# EAGLE board Arduino Due 6-channel servo current sensor v30 (EAGLE 9.7.0)
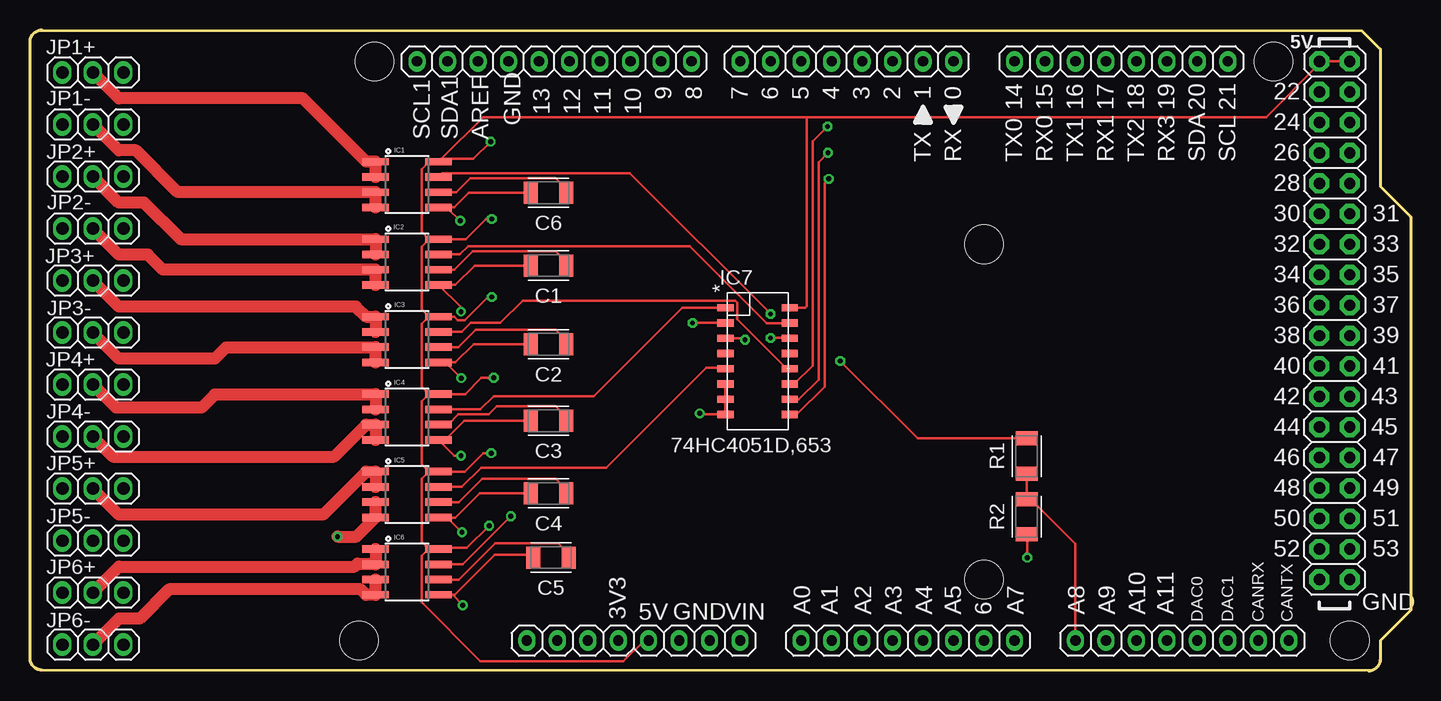
[diagram p0: board, top side]
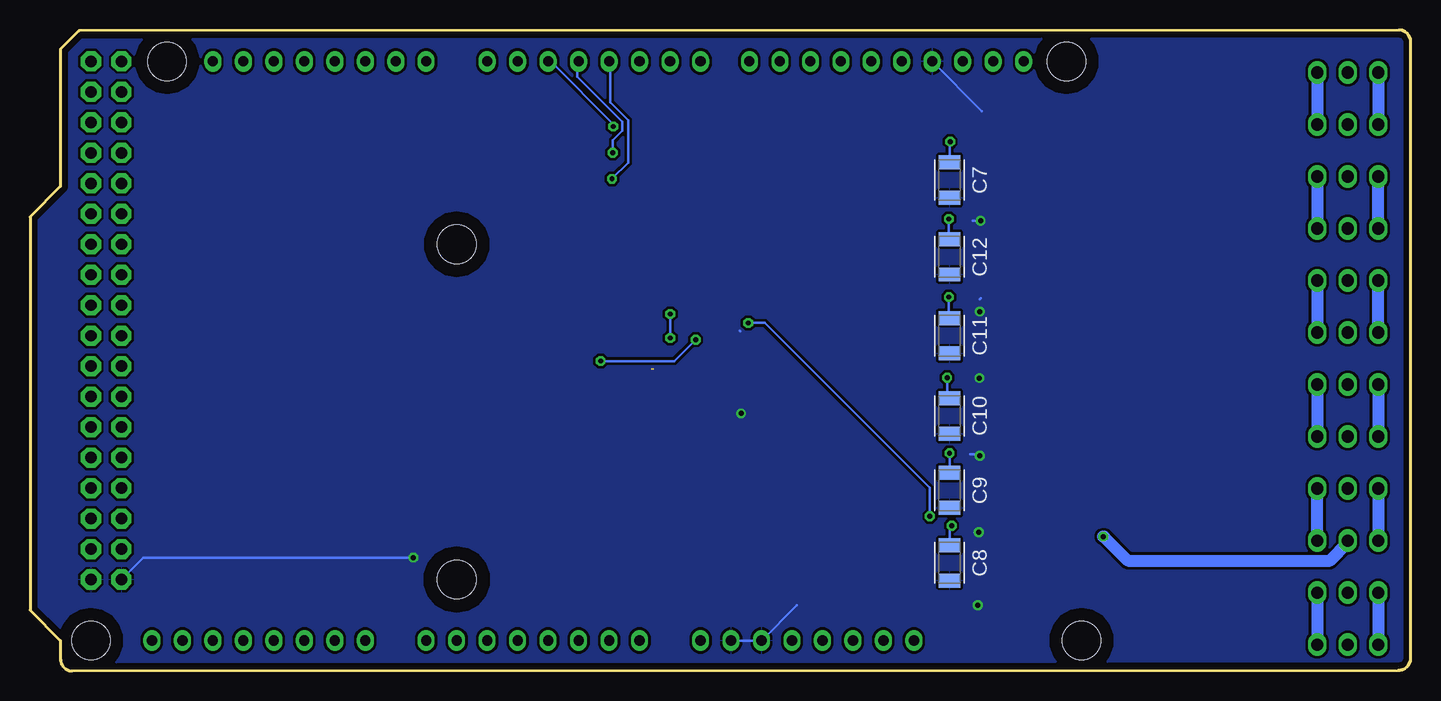
[diagram p1: board, bottom side, seen from below]

Size 115.06 x 53.42 mm. Coordinates in mm from the lower left corner, seen from the top.
Outline: 111,53.34 112.52,51.82 112.52,40.39 115.06,37.85 115.06,5.08 112.52,2.54 112.52,1 arc-90 111.52,0 1,0.08 arc-90 0,1.08 0,52.42 arc-90 1,53.42 111,53.34
Copper layers (1*16): Top 0.035mm / dielectric 1.6mm / Bottom 0.035mm
Design rules "default *": minimum track width 8mil, minimum drill 16mil, track to track 8mil, track to pad 8mil, pad to pad 8mil, via to via 8mil, smd to smd 6mil, copper to edge 20mil, drill to drill 12mil, minimum pad ring 9mil, minimum via ring 8mil, stop-mask expansion 2mil, vias tented up to drill 25mil, thermal gap 8mil
Net classes: 0 default: width 0.203 mm, drill 0.406 mm, clearance 0.203 mm; 1 USB: width 0.203 mm, drill 0.406 mm, clearance 0.203 mm; 2 gnd: width 0.203 mm, drill 0.406 mm, clearance 0.203 mm; 3 usbvcc: width 0.203 mm, drill 0.406 mm, clearance 0.203 mm; 4 USBpair: width 0.254 mm, drill 0.406 mm, clearance 0.61 mm to class 0, clearance 0.61 mm to class 1, clearance 0.61 mm to class 2, clearance 0.61 mm to class 3
Holes 3.2 mm at 109.98,2.54 28.7,50.8 103.63,50.8 27.43,2.54 79.5,35.56 79.5,7.62
tRestrict: area 77,5.1 to 82,10.2; area 26.2,48.3 to 31.2,53.3; area 77,33 to 82,38.1; area 101.1,48.3 to 106.2,53.3; area 107.4,0 to 112.5,5.1; area 24.9,0 to 30,5.1
bRestrict: area 77,5.1 to 82,10.2; area 26.2,48.3 to 31.2,53.3; area 77,33 to 82,38.1; area 101.1,48.3 to 106.2,53.3; area 107.4,0 to 112.5,5.1; area 24.9,0 to 30,5.1

## Footprints (pad centres in the part's own frame; a part is rotated, then mirrored left to right if it is on the bottom)
1X08 = drill 0.85 pad 1.422 long: 1 -8.89,0; 2 -6.35,0; 3 -3.81,0; 4 -1.27,0; 5 1.27,0; 6 3.81,0; 7 6.35,0; 8 8.89,0
CAPC3216X135 = smd 1.165 x 1.815: 1 -1.475,0; 2 1.475,0
SO08 = smd 0.61 x 2.21: 1 -1.905,-2.616; 2 -0.635,-2.616; 3 0.635,-2.616; 4 1.905,-2.616; 5 1.905,2.616; 6 0.635,2.616; 7 -0.635,2.616; 8 -1.905,2.616
SO16 = smd 1.35 x 0.6: 1 -2.215,5.62; 2 -2.215,4.35; 3 -2.215,3.08; 4 -2.215,1.81; 5 -2.215,0.54; 6 -2.215,-0.73; 7 -2.215,-2; 8 -2.215,-3.27; 9 3.135,-3.27; 10 3.135,-2; 11 3.135,-0.73; 12 3.135,0.54; 13 3.135,1.81; 14 3.135,3.08; 15 3.135,4.35; 16 3.135,5.62
1X03 = drill 1.016 long: 1 -2.54,0; 2 0,0; 3 2.54,0
1X10 = drill 0.85 pad 1.422 long: 1 -11.43,0; 2 -8.89,0; 3 -6.35,0; 4 -3.81,0; 5 -1.27,0; 6 1.27,0; 7 3.81,0; 8 6.35,0; 9 8.89,0; 10 11.43,0
RESC3216X70 = smd 1.165 x 1.815: 1 -1.475,0; 2 1.475,0
2X18 = drill 0.95 pad 1.676 octagon: 1 -21.59,-1.27; 2 -21.59,1.27; 3 -19.05,-1.27; 4 -19.05,1.27; 5 -16.51,-1.27; 6 -16.51,1.27; 7 -13.97,-1.27; 8 -13.97,1.27; 9 -11.43,-1.27; 10 -11.43,1.27; 11 -8.89,-1.27; 12 -8.89,1.27; 13 -6.35,-1.27; 14 -6.35,1.27; 15 -3.81,-1.27; 16 -3.81,1.27; 17 -1.27,-1.27; 18 -1.27,1.27; 19 1.27,-1.27; 20 1.27,1.27; 21 3.81,-1.27; 22 3.81,1.27; 23 6.35,-1.27; 24 6.35,1.27; 25 8.89,-1.27; 26 8.89,1.27; 27 11.43,-1.27; 28 11.43,1.27; 29 13.97,-1.27; 30 13.97,1.27; 31 16.51,-1.27; 32 16.51,1.27; 33 19.05,-1.27; 34 19.05,1.27; 35 21.59,-1.27; 36 21.59,1.27

## Placement (x,y rotation side)
ADCH  FH254-108DF08500V  [1X08]  96.01,2.54 0 top
ADCL  FH254-108DF08500V  [1X08]  73.15,2.54 0 top
C1  470n  [CAPC3216X135]  43.21,33.78 180 top
C2  470n  [CAPC3216X135]  43.21,27.23 180 top
C3  470n  [CAPC3216X135]  43.21,20.85 180 top
C4  470n  [CAPC3216X135]  43.21,14.81 180 top
C5  470n  [CAPC3216X135]  43.41,9.45 180 top
C6  470n  [CAPC3216X135]  43.21,39.85 180 top
C7  100n  [CAPC3216X135]  38.44,40.92 270 bottom
C8  100n  [CAPC3216X135]  38.44,9.01 270 bottom
C9  100n  [CAPC3216X135]  38.44,15.06 270 bottom
C10  100n  [CAPC3216X135]  38.44,21.26 270 bottom
C11  100n  [CAPC3216X135]  38.44,27.94 270 bottom
C12  100n  [CAPC3216X135]  38.44,34.52 270 bottom
COMMUNICATION  FH254-108DF08500V  [1X08]  90.93,50.8 0 top
IC1  ACS712  [SO08]  31.42,40.54 270 top
IC2  ACS712  [SO08]  31.42,34.08 270 top
IC3  ACS712  [SO08]  31.42,27.62 270 top
IC4  ACS712  [SO08]  31.42,21.17 270 top
IC5  ACS712  [SO08]  31.42,14.71 270 top
IC6  ACS712  [SO08]  31.42,8.25 270 top
IC7  74HC4051D,653  [SO16]  60.17,24.65 0 top
JP1+  PINHD-1X3  [1X03]  5.25,49.88 0 top
JP1-  PINHD-1X3  [1X03]  5.25,45.54 0 top
JP2+  PINHD-1X3  [1X03]  5.25,41.21 0 top
JP2-  PINHD-1X3  [1X03]  5.25,36.87 0 top
JP3+  PINHD-1X3  [1X03]  5.25,32.54 0 top
JP3-  PINHD-1X3  [1X03]  5.25,28.2 0 top
JP4+  PINHD-1X3  [1X03]  5.25,23.87 0 top
JP4-  PINHD-1X3  [1X03]  5.25,19.54 0 top
JP5+  PINHD-1X3  [1X03]  5.25,15.2 0 top
JP5-  PINHD-1X3  [1X03]  5.25,10.87 0 top
JP6+  PINHD-1X3  [1X03]  5.25,6.53 0 top
JP6-  PINHD-1X3  [1X03]  5.25,2.2 0 top
POWER  FH254-108DF08500V  [1X08]  50.29,2.54 0 top
PWMH  FH254-110DF08500V  [1X10]  43.69,50.8 180 top
PWML  FH254-108DF08500V  [1X08]  68.07,50.8 180 top
R1  2K4  [RESC3216X70]  83.06,17.91 90 top
R2  4K7  [RESC3216X70]  83.06,12.85 90 top
XIO  18x2F-H8.5  [2X18]  108.71,29.21 270 top

## Library data of the parts
ADCH ADCL COMMUNICATION POWER PWML = Connettori; MONTHLY_USAGE: _____; PART_NUMBER: 20TW-536; PRICE: _____; SUPPLIER: _____; TYPE: Connettori
C1-C12 = Capacitor; CATEGORY: Capacitor
IC1-IC6 = ACS712; PROD_ID: IC-08964
IC7 = 74HC4051D_653; PARTNO: 1727-2807-1-ND
JP1+ JP1- JP2+ JP2- JP3+ JP3- JP4+ JP4- JP5+ JP5- JP6+ JP6- = Connector; CATEGORY: CONNECTOR; SUB-CATEGORY: PIN-HEADER
PWMH = Connettori; MONTHLY_USAGE: _____; PART_NUMBER: 20TW-537; PRICE: _____; SUPPLIER: _____; TYPE: Connettori
R1 R2 = Resistor; CATEGORY: Resistor; SUB-CATEGORY: Fixed
XIO = Connettori; MONTHLY_USAGE: _____; PART_NUMBER: 12TW323; PRICE: _____; SUPPLIER: _____; TYPE: Connettori

## Nets
1IP+: IC1.1 IC1.2 JP1+.2
1IP-: IC1.3 IC1.4 JP1-.2
2IP+: IC2.1 IC2.2 JP2+.2
2IP-: IC2.3 IC2.4 JP2-.2
3IP+: IC3.1 IC3.2 JP3+.2
3IP-: IC3.3 IC3.4 JP3-.2
4IP+: IC4.1 IC4.2 JP4+.2
4IP-: IC4.3 IC4.4 JP4-.2
5IP+: IC5.1 IC5.2 JP5+.2
5IP-: IC5.3 IC5.4 JP5-.2
6IP+: IC6.1 IC6.2 JP6+.2
6IP-: IC6.3 IC6.4 JP6-.2
+3V3: POWER.4
+5V: C7.1 C8.1 C9.1 C10.1 C11.1 C12.1 IC1.8 IC2.8 IC3.8 IC4.8 IC5.8 IC6.8 IC7.16 POWER.5 XIO.1 XIO.2
AD0: ADCL.1
AD1: ADCL.2
AD2: ADCL.3
AD3: ADCL.4
AD4: ADCL.5
AD5: ADCL.6
AD6: ADCL.7
AD7: ADCL.8
AD8: ADCH.1 R1.1 R2.2
AD9: ADCH.2
AD10: ADCH.3
AD11: ADCH.4
AREF: PWMH.8
CANRX0: ADCH.7
CANTX0: ADCH.8
DAC0: ADCH.5
DAC1: ADCH.6
FILTER1: C6.1 IC1.6
FILTER2: C1.1 IC2.6
FILTER3: C2.1 IC3.6
FILTER4: C3.1 IC4.6
FILTER5: C4.1 IC5.6
FILTER6: C5.1 IC6.6
GND: C1.2 C2.2 C3.2 C4.2 C5.2 C6.2 C7.2 C8.2 C9.2 C10.2 C11.2 C12.2 IC1.5 IC2.5 IC3.5 IC4.5 IC5.5 IC6.5 IC7.6 IC7.7 IC7.8 POWER.6 POWER.7 PWMH.7 R2.1 XIO.35 XIO.36
N$1: JP6+.1 JP6-.1
N$2: JP6+.3 JP6-.3
N$5: JP5+.1 JP5-.1
N$6: JP5+.3 JP5-.3
N$7: JP4+.1 JP4-.1
N$8: JP4+.3 JP4-.3
N$9: JP3+.1 JP3-.1
N$10: JP3+.3 JP3-.3
N$11: JP2+.1 JP2-.1
N$12: JP2+.3 JP2-.3
N$13: JP1+.1 JP1-.1
N$14: JP1+.3 JP1-.3
PIN22: XIO.3
PIN23: XIO.4
PIN24: XIO.5
PIN25: XIO.6
PIN26: XIO.7
PIN27: XIO.8
PIN28: XIO.9
PIN29: XIO.10
PIN30: XIO.11
PIN31: XIO.12
PIN32: XIO.13
PIN33: XIO.14
PIN34: XIO.15
PIN35: XIO.16
PIN36: XIO.17
PIN37: XIO.18
PIN38: XIO.19
PIN39: XIO.20
PIN40: XIO.21
PIN41: XIO.22
PIN42: XIO.23
PIN43: XIO.24
PIN44: XIO.25
PIN45: XIO.26
PIN46: XIO.27
PIN47: XIO.28
PIN48: XIO.29
PIN49: XIO.30
PIN50: XIO.31
PIN51: XIO.32
PIN52: XIO.33
PIN53: XIO.34
PWM2: IC7.11 PWML.3
PWM3: IC7.10 PWML.4
PWM4: IC7.9 PWML.5
PWM5: PWML.6
PWM6: PWML.7
PWM7: PWML.8
PWM8: PWMH.1
PWM9: PWMH.2
PWM10: PWMH.3
PWM11: PWMH.4
PWM12: PWMH.5
PWM13: PWMH.6
RESET: POWER.3
RXD0: PWML.1
RXD1: COMMUNICATION.6
RXD2: COMMUNICATION.4
RXD3: COMMUNICATION.2
SCL0: COMMUNICATION.8
SCL1: PWMH.10
SDA0: COMMUNICATION.7
SDA1: PWMH.9
TXD0: PWML.2
TXD1: COMMUNICATION.5
TXD2: COMMUNICATION.3
TXD3: COMMUNICATION.1
VIN: POWER.8
VIOUT1: IC1.7 IC7.14
VIOUT2: IC2.7 IC7.15
VIOUT3: IC3.7 IC7.12
VIOUT4: IC4.7 IC7.1
VIOUT5: IC5.7 IC7.5
VIOUT6: IC6.7 IC7.2
Z-COMMON: IC7.3 R1.2

## Tracks (layer width: path | path; a pad name or v marks a point on that pad's centre or on a via)
1IP+
  Top 1.016: JP1+.2 7.41,47.71 22.74,47.71 28.01,42.44 IC1.1 IC1.2
1IP-
  Top 1.016: JP1-.2 7.41,43.38 8.84,43.38 12.31,39.9 IC1.3 IC1.4
2IP+
  Top 1.016: JP2+.2 7.41,39.04 9.49,39.04 12.55,35.98 IC2.1 IC2.2
2IP-
  Top 1.016: JP2-.2 7.41,34.71 9.82,34.71 11.08,33.44 IC2.3 IC2.4
3IP+
  Top 1.016: JP3+.2 7.41,30.37 27.16,30.37 28.01,29.53 IC3.1 IC3.2
3IP-
  Top 1.016: IC3.4 IC3.3 28.77,26.95 16.32,26.95 15.41,26.04 7.41,26.04 JP3-.2
4IP+
  Top 1.016: IC4.2 IC4.1 28.77,23.03 15.39,23.03 14.3,21.95 7.17,21.95 JP4+.2
4IP-
  Top 1.016: JP4-.2 6.91,17.87 25.35,17.87 28.01,20.53 IC4.3 IC4.4
5IP+
  Top 1.016: JP5+.2 7.41,13.03 24.43,13.03 28.01,16.61 IC5.1 IC5.2
5IP-  (via drill 0.41)
  Top 1.016: IC5.3 IC5.4 27.21,11.2 v25.63,11.2
  Bottom 1.016: v25.63,11.2 25.58,11.2 23.58,9.2 6.72,9.2 5.25,10.68 JP5-.2
6IP+
  Top 1.016: JP6+.2 7.41,8.7 27.05,8.7 27.3,8.95 28.75,8.95 IC6.2 IC6.1
6IP-
  Top 1.016: JP6-.2 7.41,4.36 9.14,4.36 11.58,6.8 27.55,6.8 28.01,6.35 IC6.4 IC6.3
+5V  (via drill 0.41)
  Top 0.203: 33.24,16.61 32.63,16 32.63,10.77 33.24,10.16 IC6.8 | 33.24,23.07 32.63,22.46 32.63,17.22 33.24,16.61 | 33.24,16.61 IC5.8 36.23,16.61 37.77,18.16 v38.43,18.16 | 33.24,29.53 32.63,28.92 32.63,23.68 33.24,23.07 | 33.24,23.07 IC4.8 36.25,23.07 37.62,24.43 v38.64,24.43 | 33.24,35.98 32.63,35.37 32.63,30.14 33.24,29.53 | 33.24,29.53 IC3.8 35.34,29.53 35.63,29.24 36.21,29.24 38.14,31.16 v38.49,31.16 | 33.24,35.98 32.63,36.59 32.63,41.83 33.24,42.44 IC1.8 34.28,42.68 | 33.24,35.98 IC2.8 36.3,35.98 37.98,37.67 v38.49,37.67 | 64.71,46.15 103.01,46.15 107.44,50.59 XIO.1 XIO.2 | 64.71,46.15 37.75,46.15 34.28,42.68 | IC6.8 33.2,10.16 32.63,9.59 32.63,5.72 37.54,0.81 49.44,0.81 51.17,2.54 POWER.5 | v38.38,44.12 36.95,42.68 34.28,42.68 | IC6.8 34.14,10.26 36.4,10.26 v38.26,12.11 | 64.71,46.15 64.71,30.38 64.59,30.25 63.34,30.25 IC7.16
  Bottom 0.203: C7.1 38.43,44.07 v38.38,44.12 | v38.49,37.67 38.49,36.04 C12.1 | v38.49,31.16 38.49,29.46 C11.1 | v38.64,24.43 38.64,22.94 C10.1 | v38.43,18.16 C9.1 | v38.26,12.11 38.43,11.94 C8.1
AD8
  Top 0.203: R1.1 R2.2 83.38,14.33 87.12,10.59 ADCH.1
FILTER1
  Top 0.203: C6.1 44.69,40.18 43.8,41.06 36.7,41.06 35.54,39.9 IC1.6
FILTER2
  Top 0.203: C1.1 44.69,34.11 43.8,34.99 36.9,34.99 35.35,33.44 IC2.6
FILTER3
  Top 0.203: IC3.6 35.7,26.99 37.16,28.44 43.8,28.44 44.69,27.55 C2.1
FILTER4
  Top 0.203: IC4.6 34.84,20.53 35.7,21.39 38.22,21.39 38.89,22.06 43.8,22.06 44.69,21.18 C3.1
FILTER5
  Top 0.203: IC5.6 35.73,14.07 37.68,16.02 43.8,16.02 44.69,15.13 C4.1
FILTER6
  Top 0.203: IC6.6 35.73,7.62 38.77,10.66 44,10.66 44.89,9.77 C5.1
GND  (via drill 0.41)
  Top 0.203: 34.83,38.63 35.34,38.63 36.56,39.85 C6.2 41.73,39.52 | 34.83,38.63 IC1.5 | C4.2 37.46,14.81 35.44,12.78 34.85,12.78 | 34.85,12.78 34.07,12.78 IC5.5 | 41.73,33.45 C1.2 37.06,33.78 35.45,32.17 IC2.5 35.92,30.29 v35.92,29.95 | 34.85,25.72 35.45,25.72 36.96,27.23 C2.2 41.7,27.14 | 34.85,25.72 IC3.5 | IC6.5 35.21,6.35 | 35.21,6.35 35.39,6.35 38.74,9.7 41.68,9.7 C5.2 | v35.84,37.51 34.83,38.53 34.83,38.63 | v35.95,24.41 34.85,25.5 34.85,25.72 | v36,11.55 34.85,12.7 34.85,12.78 | v36.07,5.48 35.21,6.35 | 107.46,7.63 XIO.35 107.34,7.5 | XIO.36 109.96,7.63 | IC7.6 IC7.7 IC7.8 | R2.1 83.11,11.33 v83.11,9.45 | 58.33,21.38 IC7.8 | 57.58,21.38 IC7.8 | C3.2 41.3,20.85 40.92,20.85 36.21,20.85 34.33,18.97 | v35.92,17.93 35.37,17.93 34.33,18.97 | 34.33,18.97 IC4.5 | IC7.8 55.89,21.38 v55.8,21.46
  Bottom 0.203: 35.84,31.06 35.92,30.99 | 35.92,24.43 v35.95,24.41 35.95,24.18 36.15,24.18 | 36.05,17.8 v35.92,17.93 35.95,17.96 35.95,18.06 36.71,18.06 | 36.05,11.55 v36,11.55 36,11.53 36.38,11.53 | 36,5.56 v36.07,5.48 36.38,5.48 | 51.16,5.48 POWER.6 POWER.7 | 36.51,37.51 v35.84,37.51 35.74,37.62 | PWMH.7 35.74,46.67 | v83.11,9.45 105.61,9.45 XIO.35 | 55.88,28.29 55.92,28.34
  pour Bottom: 0,52.42 0,1.08 arc90 1,0.08 111.52,0 arc90 112.52,1 112.52,2.54 115.06,5.08 115.06,37.85 112.52,40.39 112.52,51.82 111,53.34 1,53.42 arc90
N$1
  Bottom 1.016: JP6+.1 JP6-.1
N$2
  Bottom 1.016: JP6+.3 JP6-.3
N$5
  Bottom 1.016: JP5+.1 JP5-.1
N$6
  Bottom 1.016: JP5-.3 JP5+.3
N$7
  Bottom 1.016: JP4+.1 JP4-.1
N$8
  Bottom 1.016: JP4+.3 JP4-.3
N$9
  Bottom 1.016: JP3-.1 JP3+.1
N$10
  Bottom 1.016: JP3+.3 JP3-.3
N$11
  Bottom 1.016: JP2-.1 JP2+.1
N$12
  Bottom 1.016: JP2+.3 JP2-.3
N$13
  Bottom 1.016: JP1+.1 JP1-.1
N$14
  Bottom 1.016: JP1+.3 JP1-.3
PWM2  (via drill 0.41)
  Top 0.203: v66.46,45.38 65.21,44.13 65.21,25.45 63.68,23.92 IC7.11
  Bottom 0.203: v66.46,45.38 66.46,45.58 71.68,50.8 PWML.3
PWM3  (via drill 0.41)
  Top 0.203: v66.5,43.19 65.71,42.41 65.71,24.28 64.08,22.65 IC7.10
  Bottom 0.203: v66.5,43.19 66.5,44.22 65.71,45 65.71,45.75 69.46,49.5 69.46,50.75 PWML.4
PWM4  (via drill 0.41)
  Top 0.203: v66.56,41.01 66.21,40.66 66.21,23.68 63.91,21.38 IC7.9
  Bottom 0.203: v66.56,41.01 65.21,42.36 65.21,45.88 66.71,47.38 66.71,50.75 PWML.5
VIOUT1  (via drill 0.41)
  Top 0.203: v61.71,27.75 63.21,27.75 IC7.14 | IC1.7 34.34,41.47 49.99,41.47 v61.71,29.75
  Bottom 0.203: v61.71,29.75 v61.71,27.75
VIOUT2
  Top 0.203: IC2.7 35.82,34.71 36.51,35.4 54.98,35.4 61.38,29 IC7.15
VIOUT3  (1 unrouted)
  Top 0.203: 63.21,25.25 IC7.12 | IC3.7 35.96,28.26 36.71,29.01 39.18,29.01 41.04,30.87 58.76,30.87 58.93,30.69 58.93,29.33 63.07,25.19
VIOUT4
  Top 0.203: IC7.1 57.84,30.25 54.34,30.25 46.98,22.89 43.83,22.89 38.63,22.89 37.54,21.8 IC4.7
VIOUT5
  Top 0.203: IC7.5 57.84,25.25 56.34,25.25 48.04,16.95 37.59,16.95 35.98,15.34 IC5.7
VIOUT6  (via drill 0.41)
  Top 0.203: v55.21,29 57.84,29 IC7.2 | IC6.7 36.08,8.89 v40.08,12.89
  Bottom 0.203: v40.08,12.89 40.08,15.26 53.81,29 v55.21,29
Z-COMMON  (via drill 0.41)
  Top 0.203: IC7.3 59.47,27.73 v59.59,27.61 | v67.51,25.83 73.96,19.38 R1.2
  Bottom 0.203: v59.59,27.61 61.37,25.83 v67.51,25.83

## Text on the board
tPlace: 9 | 8 | 7 | 6 | 5 | 4 | 3 | 2 | 1 | 0 | 22 | 14 | 15 | 16 | 17 | 18 | 19 | 20 | 21 | 13 | 12 | 11 | 10 | 24 | 26 | 28 | 30 | 31 | 32 | 33 | 34 | 35 | 36 | 37 | 38 | 39 | 40 | 41 | 42 | 43 | 44 | 45 | 46 | 47 | 48 | 49 | 50 | 51 | 52 | 53 | A0 | A1 | A2 | A3 | A4 | A5 | 6 | A7 | A8 | A9 | A10 | A11 | DAC0 | DAC1 | CANRX | CANTX
tNames: 5V | GND | SCL1 | SDA1 | AREF | TX | RX | TX0 | RX0 | TX1 | RX1 | TX2 | RX3 | SDA | SCL | GND | 3V3 | 5V | GND | VIN